# Altium PCB TPS54561_Buck_HV.PcbDoc
Units mil, origin at the board's own origin, x right, y up, seen from the top; angles counter-clockwise.
Board outline 2263.78 x 1476.38 mil, 2 copper layers (Top Layer, Bottom Layer); 27 components, 15 nets, 107 pads, 1 vias.
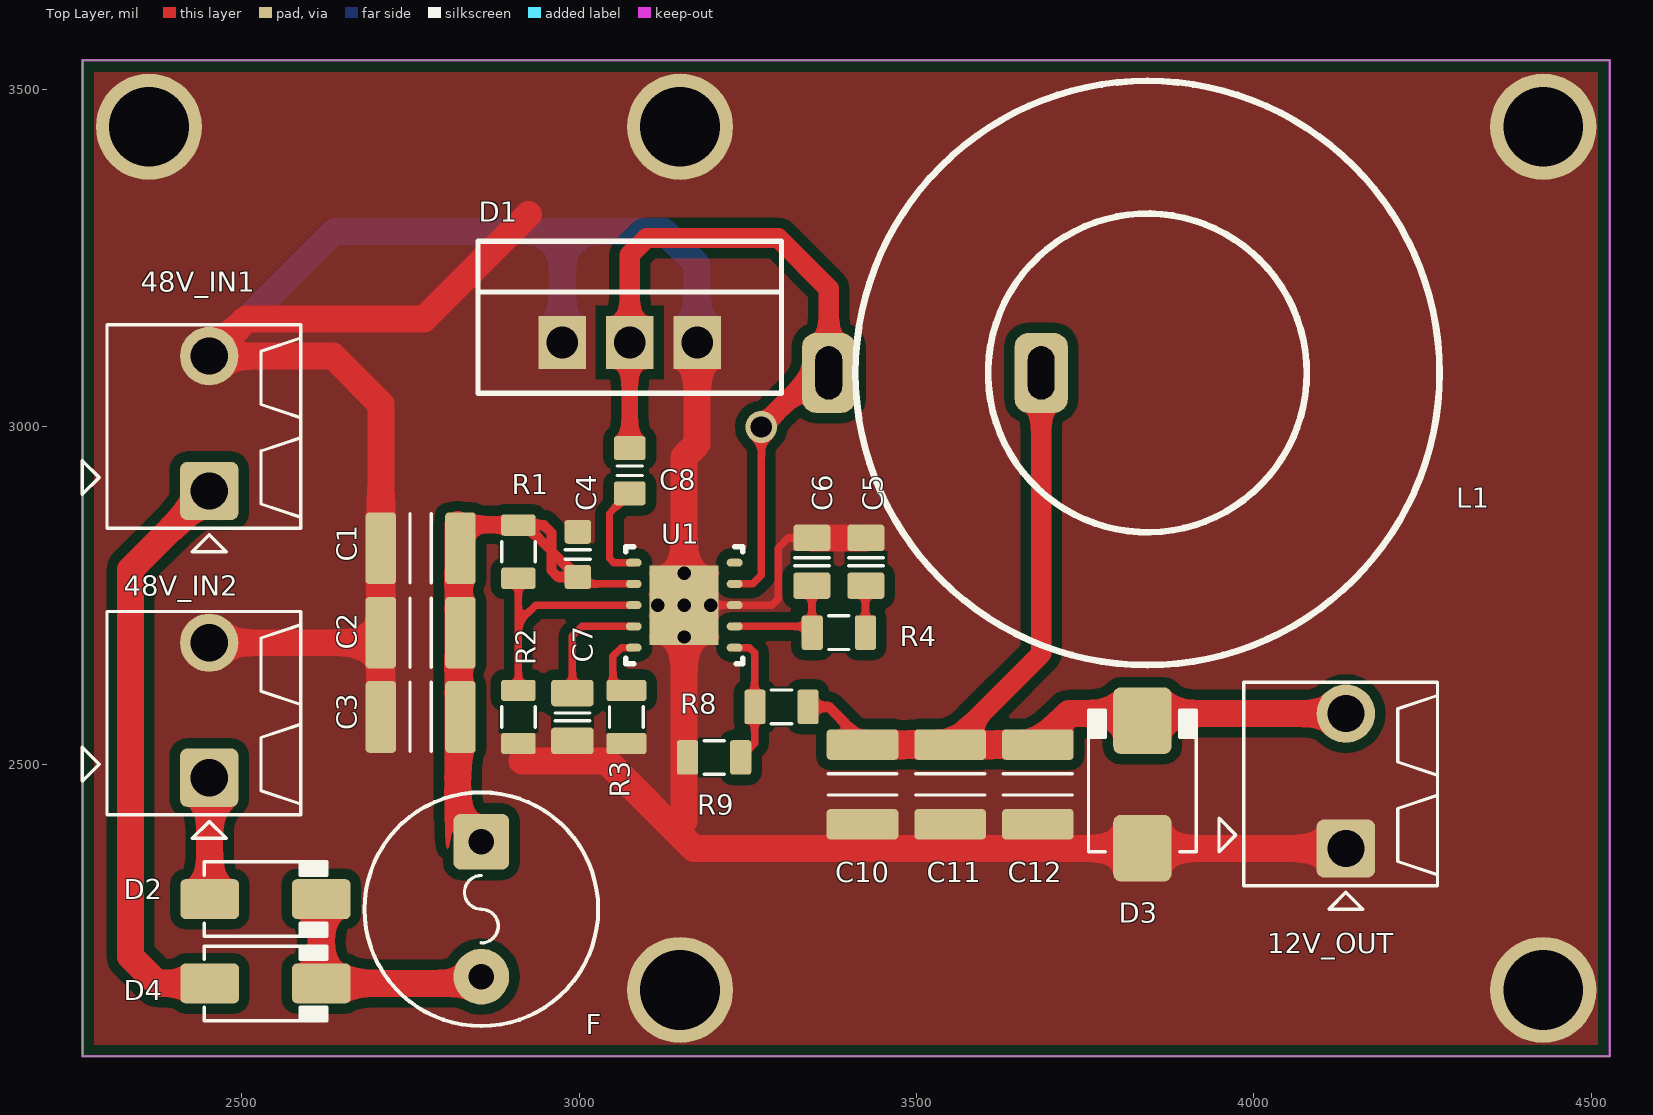
[diagram p0: Top Layer view]
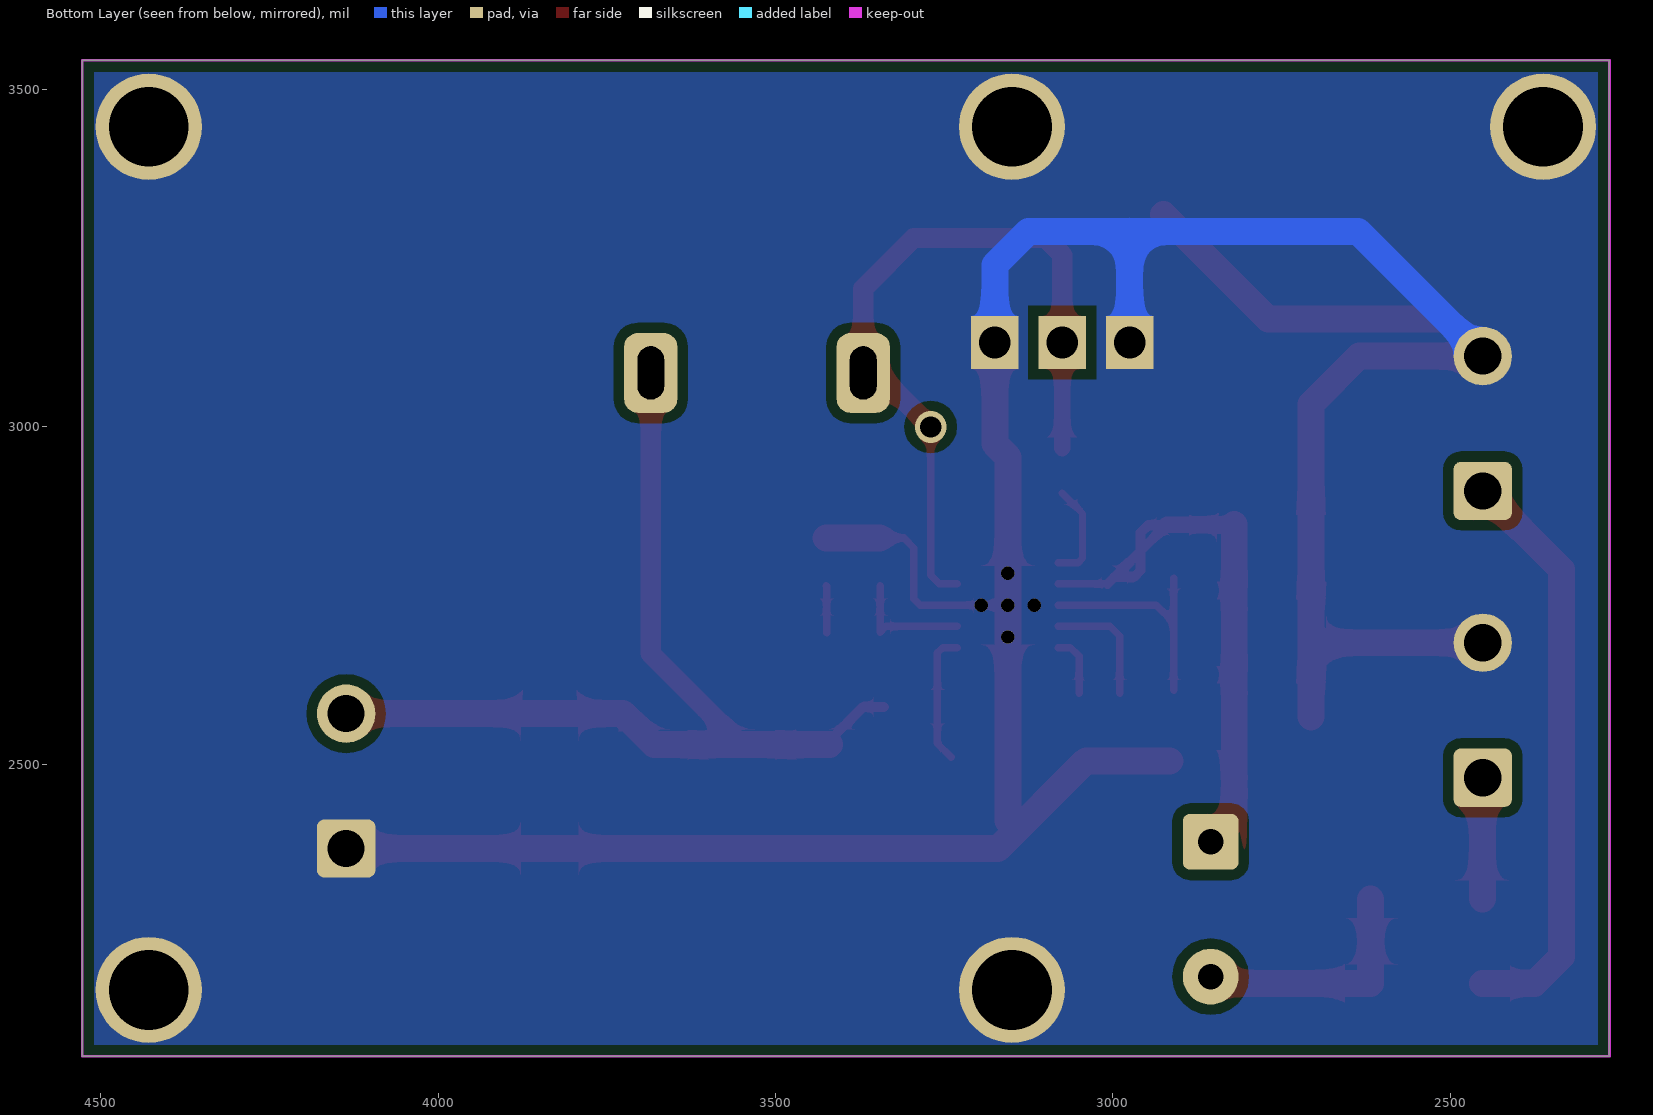
[diagram p1: Bottom Layer view, seen from below]
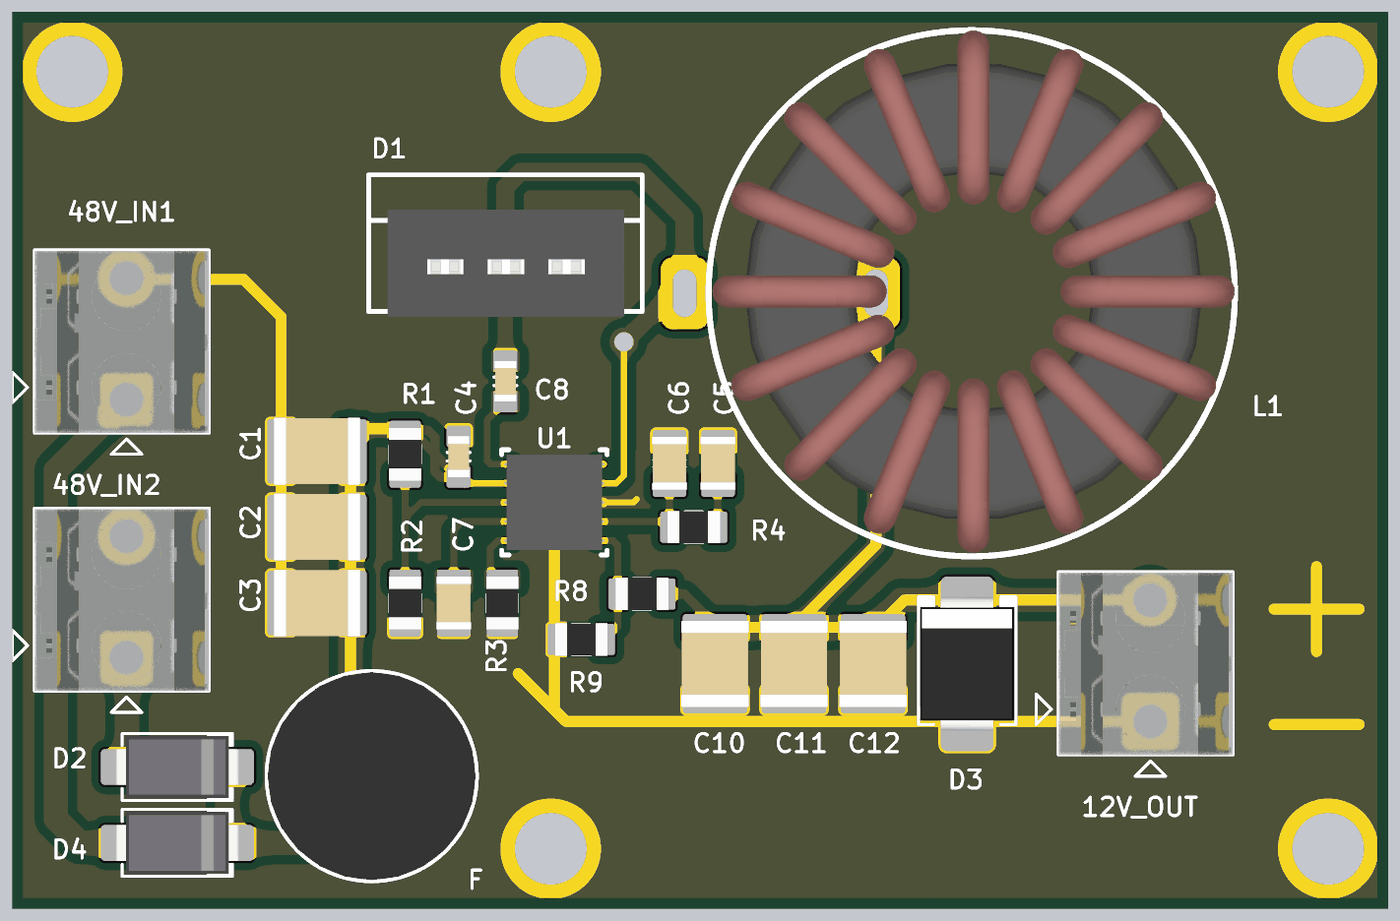
[diagram p2: 3D render of the assembled board from above, using the file's embedded part models]

## Layer stack, top to bottom
Top Solder: solder mask 0.4, Solder Resist, Dk 3.5
Top Layer: signal copper 1.4
Dielectric 1: dielectric 12.6, FR-4, Dk 4.8
Bottom Layer: signal copper 1.4
Bottom Solder: solder mask 0.4, Solder Resist, Dk 3.5

## Board outline
2263.78,2066.93 4527.56,2066.93 4527.56,3543.31 2263.78,3543.31

## Design rules (kind name [scope] priority, off if disabled: settings)
Clearance [All] p1: gap=15
PlaneConnect [All] p1: planeconnectstyle=Direct reliefexpansion=20 reliefentries=4 reliefconductorwidth=10 reliefairgap=10
PolygonConnect [All] p1: connectstyle=Direct reliefconductorwidth=10 reliefentries=4 polygonreliefangle="90 Angle" airgapwidth=10
RoutingVias [All] p1: holewidth=28 width=50 viastyle="Through Hole" minholewidth=19.68 minwidth=43.31 maxholewidth=196.85 maxwidth=196.85
SolderMaskExpansion [All] p1: expansion=4
Width [All] p1: maxlimit=78.74 minlimit=10 preferedwidth=10
29 further rules are at their usual default settings.

## Components (designator, comment, footprint, x,y, rotation, side; value= is the part's Value field where it differs from the comment)
12V_OUT "Stackable ScrewTerm" 2P_PCB_ScrewTerm_200mil 3985,2320 r0 top
48V_IN1 "Stackable ScrewTerm" 2P_PCB_ScrewTerm_200mil 2300,2850 r0 top
48V_IN2 "Stackable ScrewTerm" 2P_PCB_ScrewTerm_200mil 2300,2425 r0 top
C1 "CAP NP" CAPC3225N 2765,2820 r0 top
C2 "CAP NP" CAPC3225N 2765,2695 r0 top
C3 "CAP NP" CAPC3225N 2765,2570 r0 top
C4 "CAP NP" CAPC1608N 2998,2811 r270 top
C5 "CAP NP" CAPC2012N 3425,2800 r270 top
C6 "CAP NP" CAPC2012N 3345,2800 r90 top
C7 "CAP NP" CAPC2012N_F 2990,2570 r270 top
C8 "CAP NP" CAPC1608N_F 3075,2935 r270 top
C10 "CAP NP" CAPC3225N 3420,2470 r90 top
C11 "CAP NP" CAPC3225N 3550,2470 r90 top
C12 "CAP NP" CAPC3225N 3680,2470 r90 top
D1 "MOSPEC S20C40C" TO-220 3075,3125 r0 top
D2 "" DO-214AC 2535,2300 r0 top
D3 "TVS12V" DO-214AA 3835,2470 r90 top
D4 "SS14" DO-214AC 2535,2175 r0 top
F "1.5A" FUSE_SR-5-BK 2855,2285 r270 top
L1 "Inductor" Toroid 3370,3085 r0 top
R1 "Res" RESC2012N 2910,2815 r90 top
R2 "Res" RESC2012N 2910,2570 r90 top
R3 "Res" RESC2012N_F 3070,2570 r90 top
R4 "Res" RESC2012N 3385,2695 r180 top
R8 "Res" RESC2012N 3300,2585 r0 top
R9 "Res" RESC2012N 3200,2510 r0 top
U1 "TPS54561_Buck" DPR0010A 3075,2655 r0 top

## Footprints (in the part's own frame and the unit in brackets; to place one, negate y for a bottom-side part, rotate by r counter-clockwise, add the part's x,y. Pads: shape width x height; smd on the part's side, far side on the other; paste and mask are expansions set on the pad)
2P_PCB_ScrewTerm_200mil [mm]
  rrect25% 2.2x2.2 hole 1.4: 1(3.85,1.397)
  round 2.2 hole 1.4: 2(3.85,6.477)
  silkscreen extent -0.93,-0.89 7.3,7.66, body extent 0,0 7.3,7.62, height 8.5
CAPC1608N [mm] "Chip Capacitor, Body 1.6x0.8mm, 0603, IPC Medium Density"
  round 0.254 on Mech14: 0(0,0)
  rrect25% 0.9x1 smd: 1(-0.85,0) 2(0.85,0)
  Top Layer pour cut-out: -0.4,0.6 0.4,0.6 0.4,-0.6 -0.4,-0.6
  silkscreen extent -0.18,-0.48 0.18,0.48, body extent -0.85,-0.45 0.85,0.45, height 0.89
CAPC1608N_F [mm] "Chip Capacitor, Body 1.6x0.8mm, 0603, IPC Medium Density, for Flex circuits"
  round 0.254 on Mech14: 0(0,0)
  rrect25% 1.1x1 on Top Solder: 1(-0.85,0) 1(0.85,0)
  rrect25% 0.9x1.2 smd paste-1: 1(-0.85,0) 2(0.85,0)
  rrect25% 0.9x1 on Top Paste: 1(-0.85,0) 1(0.85,0)
  Top Layer pour cut-out: -0.4,0.6 0.4,0.6 0.4,-0.6 -0.4,-0.6
  silkscreen extent -0.18,-0.48 0.18,0.48, body extent -0.85,-0.45 0.85,0.45, height 0.89
CAPC2012N [mm] "Chip Capacitor, Body 2.0x1.2mm, 0805, IPC Medium Density"
  round 0.254 on Mech14: 0(0,0)
  rrect25% 1x1.4 smd: 1(-0.9,0) 2(0.9,0)
  Top Layer pour cut-out: -0.4,0.8 0.4,0.8 0.4,-0.8 -0.4,-0.8
  silkscreen extent -0.15,-0.65 0.15,0.65, body extent -1.1,-0.72 1.1,0.73, height 1.34
CAPC2012N_F [mm] "Chip Capacitor, Body 2.0x1.2mm, 0805, IPC Medium Density, for Flex circuits"
  round 0.254 on Mech14: 0(0,0)
  rrect25% 1.2x1.4 on Top Solder: 1(-0.9,0) 1(0.9,0)
  rrect25% 1x1.6 smd paste-1: 1(-0.9,0) 2(0.9,0)
  rrect25% 1x1.4 on Top Paste: 1(-0.9,0) 1(0.9,0)
  Top Layer pour cut-out: -0.4,0.8 0.4,0.8 0.4,-0.8 -0.4,-0.8
  silkscreen extent -0.15,-0.65 0.15,0.65, body extent -1.1,-0.72 1.1,0.73, height 1.34
CAPC3225N [mm] "Chip Capacitor, Body 3.2x2.5mm, 1210, IPC Medium Density"
  round 0.508 on Mech14: 0(0,0)
  rrect25% 1.15x2.7 smd: 1(-1.5,0) 2(1.5,0)
  silkscreen extent -0.4,-1.3 0.4,1.3, body extent -1.8,-1.4 1.8,1.4, height 2.19
DO-214AA [mm] "JEDEC DO214 variation AA. SMB"
  round 0.508 on Mech14: 0(0,0)
  rrect25% 2.5x2.2 smd: A(-2.4,0) K(2.4,0)
  silkscreen extent -2.54,-2.03 2.79,2.03, body extent -2.8,-1.97 2.8,1.98, height 2.62
DO-214AC [mm] "JEDEC DO214 variation AC. SMA"
  round 0.508 on Mech14: 0(0,0)
  rrect25% 2.2x1.5 smd: A(-2.1,0) K(2.1,0)
  silkscreen extent -2.3,-1.4 2.3,1.4, body extent -2.6,-1.3 2.6,1.3, height 2.42
DPR0010A [mm]
  oval 0.6x0.3 smd paste-0.102 mask+0.051: 1(0.15,3.65) 2(0.15,2.85) 3(0.15,2.05) 4(0.15,1.25) 5(0.15,0.45) 6(3.95,0.45) 7(3.95,1.25) 8(3.95,2.05) 9(3.95,2.85) 10(3.95,3.65)
  round 0.5 hole 0.5 mask+0.051: 11(1.05,2.05) 11(2.05,0.85) 11(2.05,2.05) 11(2.05,3.25) 11(3.05,2.05)
  rect 2.6x3 smd paste-1.3 mask+0.051: 11(2.05,2.05)
  silkscreen extent -0.15,-0.15 4.25,4.25, body extent 0.05,0.05 4.05,4.05, height 0.8
FUSE_SR-5-BK [mm]
  round 0.5 on Mech14: 0(0,0)
  rrect25% 2.1x2.1 hole 0.965: 1(-2.54,0)
  round 2.1 hole 0.965: 2(2.54,0)
  silkscreen extent -4.4,-4.4 4.4,4.4, body extent -4.35,-4.32 4.35,4.32, height 8.29
RESC2012N [mm] "Chip Resistor, Body 2.0x1.2mm, 0805, IPC Medium Density"
  round 0.254 on Mech14: 0(0,0)
  rrect25% 0.8x1.3 smd: 1(-1,0) 2(1,0)
  Top Layer pour cut-out: -0.6,0.75 0.6,0.75 0.6,-0.75 -0.6,-0.75
  silkscreen extent -0.38,-0.64 0.38,0.64, body extent -1.1,-0.67 1.1,0.68, height 0.69
RESC2012N_F [mm] "Chip Resistor, Body 2.0x1.2mm, 0805, IPC Medium Density"
  round 0.254 on Mech14: 0(0,0)
  rrect25% 1x1.3 on Top Solder: 1(-1,0) 1(1,0)
  rrect25% 0.8x1.5 smd paste-1: 1(-1,0) 2(1,0)
  rrect25% 0.8x1.3 on Top Paste: 1(-1,0) 1(1,0)
  Top Layer pour cut-out: -0.6,0.75 0.6,0.75 0.6,-0.75 -0.6,-0.75
  silkscreen extent -0.38,-0.64 0.38,0.64, body extent -1.1,-0.67 1.1,0.68, height 0.69
TO-220 [mm]
  rect 1.8x2 hole 1.2: 1(-2.54,0) 2(0,0) 3(2.54,0)
  silkscreen extent -5.71,-1.91 5.71,3.81, body extent -4.92,-2.13 4.98,2.37, height 8.08
Toroid [mm]
  rrect50% 2x3 hole 1 slot 2 at 90 deg: 1(0,-0.127) 2(8,-0.127)
  silkscreen extent 1,-11.13 23,10.87, body extent 1.16,-10.97 23,10.87, height 11.43

## Part data
12V_OUT 48V_IN1 48V_IN2: library part 2P_ScrewTerm_90S_3.81MM, "Terminal Block Screw Type THT 2-Position 3.81mm pitch"
D1: library part "Diode x2"
D2 D3 D4: library part "Diode Schottky"
F: library part Fuse

## Free pads (board coordinates)
  round 157.48 hole 118.11: GND(2362.2,3444.88) GND(3149.61,2165.35) GND(3149.61,3444.88) GND(4429.13,2165.35) GND(4429.13,3444.88)

## Via types
v1: diameter 47.24, hole 31.5, Top Layer to Bottom Layer, tented both sides, 1 vias

## Nets (pads, with @x,y where several pads share a name; then routed paths per layer and width w, separated by ;. In a path a pad name is that pad's centre, name@x,y a point inside that pad or via, vN(x,y) a via of type N, cw(c..) or ccw(c..) an arc to the next point about the centre after c; other vN are vias at no path point)
+12V: 12V_OUT.2 C10.2 C11.2 C12.2 D3.K L1.2 R8.2 | length 1449.7
  Top Layer w15: R8.2 3370,2585 3420,2535 C10.2
  Top Layer w30: C11.2 3684.96,2664.02 L1.2
  Top Layer w40: C10.2 C11.2 C12.2 3725.94,2575 12V_OUT.2
+48V_IN1: 48V_IN2.1 D2.A | length 180.3
  Top Layer w40: 48V_IN2.1 2452.32,2479.25 D2.A
+48V_IN2: 48V_IN1.1 D4.A | length 872.2
  Top Layer w40: 48V_IN1.1 2335,2788.43 2335,2215 2375,2175 D4.A
BOOT: C8.2 U1.1 | length 147.5
  Top Layer w11: C8.2 3045,2871.54 3045,2805 3051.3,2798.7 U1.1
COMP: C6.1 R4.2 U1.7 | length 187
  Top Layer w11: U1.7 3336.42,2704.21 3345,2695.63 C6.1
EN: R1.1 R2.2 U1.3 | length 347.8
  Top Layer w11: R2.2 2910,2710 ; R1.1 2910,2710 ; U1.3 2935.71,2735.71 2910,2710
FB: R8.1 R9.2 U1.6 | length 196.2
  Top Layer w11: U1.6 3252.28,2672.72 3260,2665 3260,2530.63 R9.2
GND: 12V_OUT.1 48V_IN1.2 48V_IN2.2 C1.1 C2.1 C3.1 C4.1 C5.1 C6.2 C7.2 C10.1 C11.1 C12.1 D1.1 D1.3 D3.A pad.GND R2.1 R3.1@3070,2530.63 R9.1 U1.8 U1.11 | length 5017.1
  Top Layer w11: U1.11@3155.71,2735.71 3195.08,2735.71 U1.8 3285.71,2735.71 3295,2745 3295,2820.43 3310,2835.43 C6.2
  Top Layer w40: 48V_IN2.2 2690.94,2680 C2.1 ; C3.1 C2.1 ; 2915,2505 3040,2505 3170,2375 12V_OUT.1 ; 2925,3315 2770,3160 2506.57,3160 48V_IN1.2 2635,3105 2705.94,3034.06 C1.1 C2.1 ; 3155.71,2415.71 3155.71,2688.46 3155.71,2735.71 3155.71,2782.95 3155.71,2955.71 3175,2975 D1.3 ; C6.2 C5.1
  Bottom Layer w40: 48V_IN1.2 2636.57,3290 2975,3290 ; D1.1 2975,3290 ; D1.3 3175,3240 3125,3290 2975,3290
NetC5_2: C5.2 R4.1 | length 69.8
  Top Layer w11: R4.1 3424.37,2763.94 C5.2
NetD2_2: D2.K D4.K F.2 | length 366.5
  Top Layer w40: D2.K D4.K 2845,2175 F.2
PWRGD: U1.10
RT_CLK: R3.2 U1.5 | length 91.2
  Top Layer w11: R3.2@3050,2605 3050,2660 3062.72,2672.72 U1.5
SS_TR: C7.1@2990,2605.43 U1.4 | length 181.4
  Top Layer w11: C7.1@2990,2605.43 2990,2690 3004.21,2704.21 U1.4
SW: C8.1@3075,2968.46 D1.2 L1.1 U1.9 | length 1150.9
  Top Layer w11: U1.9 3257.2,2767.2 3270,2780 v1(3270,3000)
  Top Layer w25: C8.1@3075,2968.46 D1.2
  Top Layer w30: D1.2 3075,3255 3100,3280 3295,3280 3370,3205 L1.1 3350,3080 v1(3270,3000)
  Bottom Layer w30: v1(3270,3000) v1@3275,3000
VIN: C1.2 C2.2 C3.2 C4.2 F.1 R1.2 U1.2 | length 934.4
  Top Layer w11: C4.2@3007.8,2767.2 U1.2
  Top Layer w15: R1.2 R1.2@2920.63,2854.37 ; R1.2@2920,2855 R1.2@2920.63,2854.37 ; C4.2 C4.2@2997.46,2777.54 ; C4.2@3007.8,2767.2 C4.2@2997.46,2777.54 ; R1.2@2920.63,2854.37 2947.63,2854.37 2959,2843 2959,2816 ; R1.2@2920.63,2854.37 2959,2816 ; 2959,2816 C4.2@2997.46,2777.54 ; 2959,2816 2959,2787 2968.46,2777.54 C4.2@2997.46,2777.54
  Top Layer w25: C1.2@2820,2855 R1.2@2920,2855
  Top Layer w40: C1.2@2820,2855 2820,2420 F.1
pads on no net: C1.0 C2.0 C3.0 C4.0 C5.0 C6.0 C7.0 C7.1@2989.99,2534.57 C7.1@2989.99,2605.44 C7.1@2990,2534.57 C7.1@2990,2605.43 C8.0 C8.1@3074.99,2901.54 C8.1@3075,2901.54 C8.1@3075,2968.46 C8.1@3075.01,2968.46 C10.0 C11.0 C12.0 D2.0 D3.0 D4.0 F.0 R1.0 R2.0 R3.0 R3.1@3070,2530.63 R3.1@3070,2609.37 R3.1@3070.01,2530.63 R3.1@3070.01,2609.37 R4.0 R8.0 R9.0

## Polygon pours and split planes (outlines as drawn)
GND on Top Layer "Bottom Layer-No Net" (solid, pour order 2): 2263.78,2066.93 4527.56,2066.93 4527.56,3543.31 2263.78,3543.31
GND on Bottom Layer "Bottom Layer-No Net" (solid, pour order 4): 2263.78,2066.93 4527.56,2066.93 4527.56,3543.31 2263.78,3543.31

## Keep-outs
Keep-Out Layer:
  the board outline again, w3.94

## Silkscreen, mask and mechanical layers (free items; w line width, h text height)
Top Solder:
  lines w10: 3009,2767 3081,2767 ; 3195.08,2735.71 3285.71,2735.71 3291,2741 ; 3231,2767 3257,2767 3270,2780 3270,3000
  lines w18: 2451.57,3105 2453.57,3103 2644,3103 2706,3041 2706,2569 ; 2821,2857 2901,2857 ; 2825,2846 2820,2841 2820,2432 2855,2397 2855,2385 ; 3096,2454 3175,2375 4136.57,2375 ; 3155.71,2401.71 3155.71,2688.46 ; 3463,2530 3687,2530 3732,2575 4136.57,2575 ; 3562,2543 3684.96,2665.96 3684.96,3080 ; 4340,2370 4480,2370 ; 4340,2560 4480,2560 ; 4410,2490 4410,2630